# Altium PCB PCB2.PcbDoc
Units mil, origin at the board's own origin, x right, y up, seen from the top; angles counter-clockwise.
Board outline 6000 x 4000 mil, 2 copper layers (Top Layer, Bottom Layer); 67 components, 73 nets, 308 pads, 0 vias.
Unrouted connection lines stored in the file: 160.
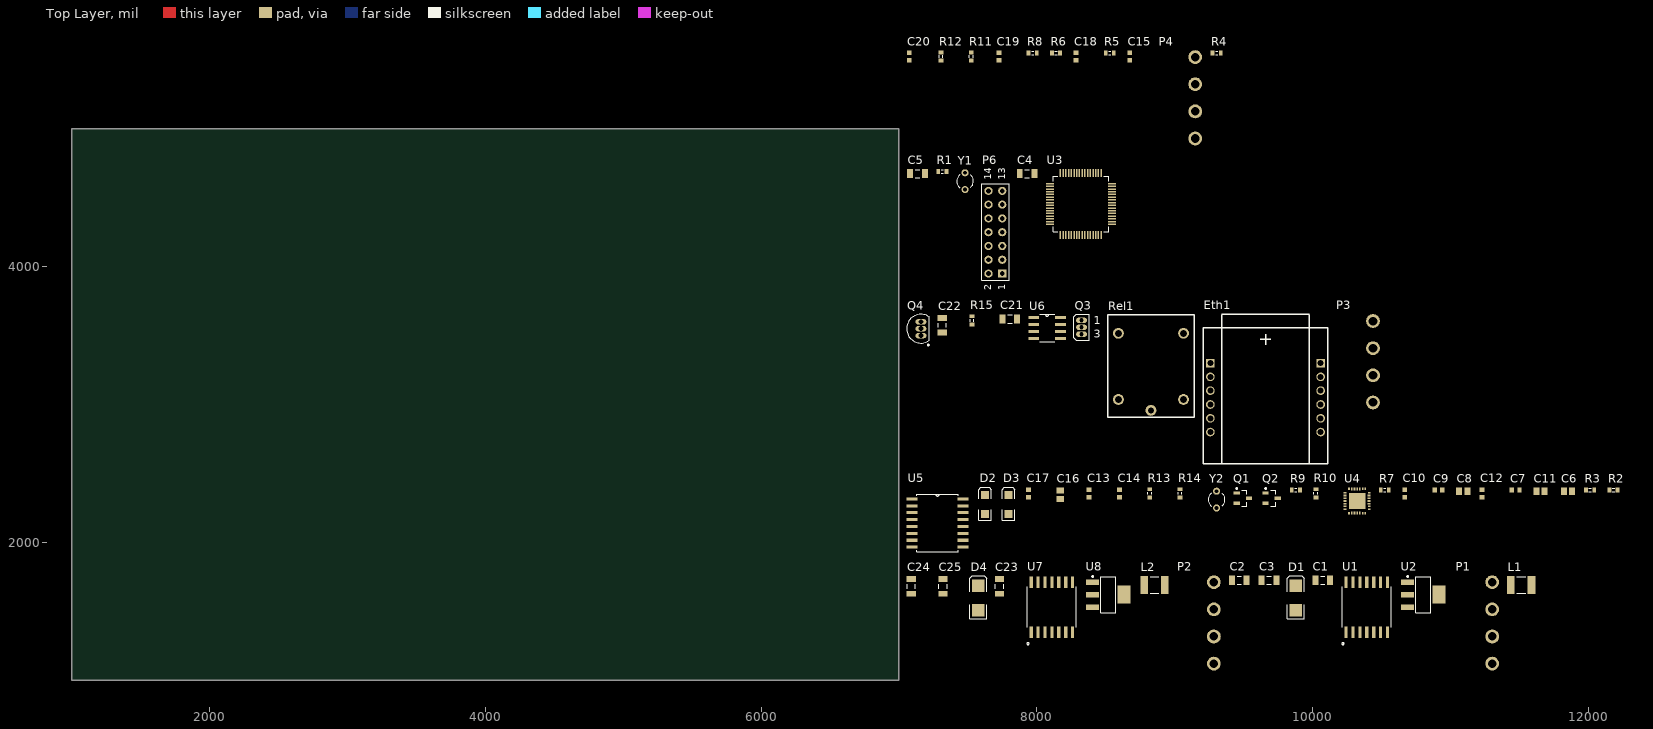
[diagram p0: Top Layer view]
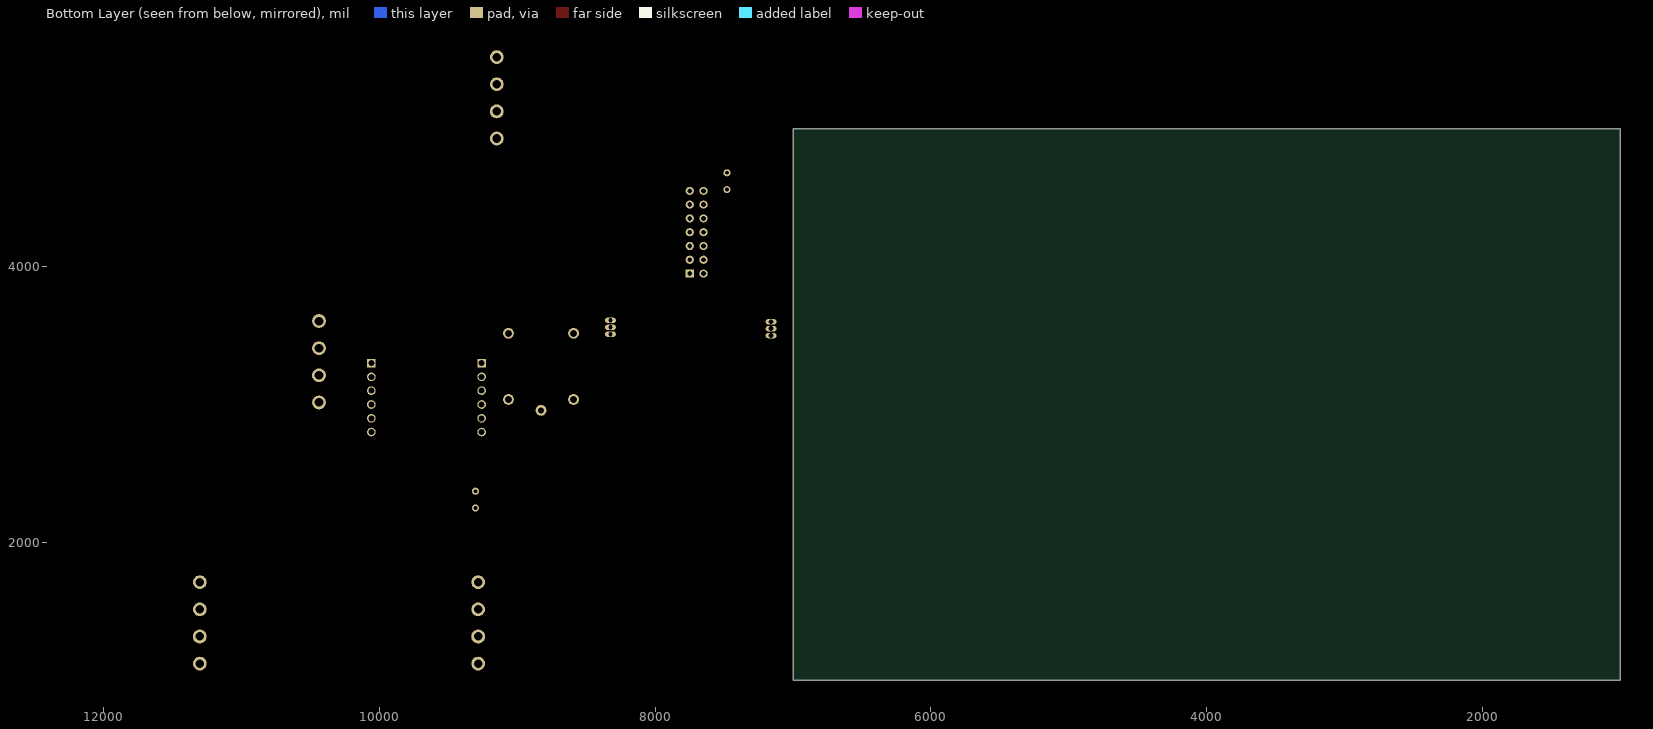
[diagram p1: Bottom Layer view, seen from below]

## Layer stack, top to bottom
Top Solder: solder mask 0.4, Solder Resist, Dk 3.5
Top Layer: signal copper 1.4
Dielectric 1: dielectric 12.6, FR-4, Dk 4.8
Bottom Layer: signal copper 1.4
Bottom Solder: solder mask 0.4, Solder Resist, Dk 3.5

## Board outline
1000,1000 7000,1000 7000,5000 1000,5000

## Design rules (kind name [scope] priority, off if disabled: settings)
Clearance [All] p1: gap=10
PolygonConnect [All] p1: connectstyle=Relief reliefconductorwidth=10 reliefentries=4 polygonreliefangle="90 Angle" airgapwidth=10
RoomDefinition ParteAnalogicaMedicion [InComponentClass('ParteAnalogicaMedicion')] p1: confinementstyle=ConfineIn formatcopy=TRUE lockcomponents=FALSE outline 7045,4870 9385,4870 9385,5680 7045,5680
RoomDefinition Micro [InComponentClass('Micro')] p2: confinementstyle=ConfineIn formatcopy=TRUE lockcomponents=FALSE outline 7045,3815 8585,3815 8585,4820 7045,4820
RoomDefinition comms [InComponentClass('comms')] p3: confinementstyle=ConfineIn formatcopy=TRUE lockcomponents=FALSE outline 7045,2560 10500,2560 10500,3765 7045,3765
RoomDefinition CircuitoMedidorADE [InComponentClass('CircuitoMedidorADE')] p4: confinementstyle=ConfineIn formatcopy=TRUE lockcomponents=FALSE outline 7045,1925 12265,1925 12265,2510 7045,2510
RoomDefinition Alimentacion [InComponentClass('Alimentacion')] p5: confinementstyle=ConfineIn formatcopy=TRUE lockcomponents=FALSE outline 7045,1060 11630,1060 11630,1870 7045,1870
RoutingVias [All] p1: holewidth=28 width=50 viastyle="Through Hole" minholewidth=28 minwidth=50 maxholewidth=28 maxwidth=50
SolderMaskExpansion [All] p1: expansion=4
Width [All] p1: maxlimit=10 minlimit=10 preferedwidth=10
30 further rules are at their usual default settings.

## Classes and differential pairs
component class ParteAnalogicaMedicion: C15 C18 C19 C20 P4 R4 R5 R6 R8 R11 R12
component class Micro: C4 C5 P6 R1 U3 Y1
component class comms: C21 C22 Eth1 P3 Q3 Q4 R15 Rel1 U6
component class CircuitoMedidorADE: C6 C7 C8 C9 C10 C11 C12 C13 C14 C16 C17 D2 D3 Q1 Q2 R2 R3 R7 R9 R10 R13 R14 U4 U5 Y2
component class Alimentacion: C1 C2 C3 C23 C24 C25 D1 D4 L1 L2 P1 P2 U1 U2 U7 U8

## Components (designator, comment, footprint, x,y, rotation, side; value= is the part's Value field where it differs from the comment)
C1 "Cap Semi" C1206 10075,1725 r0 top
C2 "Cap Semi" C1206 9470,1725 r0 top
C3 "Cap Semi" C1206 9685,1725 r0 top
C4 "Cap Semi" C1206 7930,4675 r0 top
C5 "Cap Semi" C1206 7135,4675 r0 top
C6 "Cap Pol3" C0805 11855,2370 r0 top
C7 "Cap" 1608[0603] 11475,2380 r0 top
C8 "Cap Pol3" C0805 11095,2370 r0 top
C9 "Cap" 1608[0603] 10915,2380 r0 top
C10 "Cap" 1608[0603] 10670,2355 r90 top
C11 "Cap Pol3" C0805 11655,2370 r0 top
C12 "Cap" 1608[0603] 11230,2355 r90 top
C13 "Cap" 1608[0603] 8380,2355 r90 top
C14 "Cap" 1608[0603] 8600,2355 r90 top
C15 "Cap" 1608[0603] 8675,5525 r90 top
C16 "Cap Pol3" C0805 8170,2345 r90 top
C17 "Cap" 1608[0603] 7940,2355 r90 top
C18 "Cap" 1608[0603] 8285,5525 r90 top
C19 "Cap" 1608[0603] 7725,5525 r90 top
C20 "Cap" 1608[0603] 7075,5525 r90 top
C21 "Cap Semi" C1206 7805,3620 r0 top
C22 "Cap Semi" C1206 7315,3575 r90 top
C23 "Cap Semi" C1206 7730,1680 r90 top
C24 "Cap Semi" C1206 7090,1680 r90 top
C25 "Cap Semi" C1206 7320,1680 r90 top
D1 "D Schottky" SMB 9880,1595 r90 top
D2 "LED2" 3.2X1.6X1.1 7625,2275 r90 top
D3 "LED2" 3.2X1.6X1.1 7795,2275 r90 top
D4 "D Schottky" SMB 7575,1595 r90 top
Eth1 "wiz8" wiz8 9260,2800 r0 top
L1 "Inductor" INDC4532 11515,1690 r0 top
L2 "Inductor" INDC4532 8855,1690 r0 top
P1 "Header 4" ConectorPrsr 11305,1120 r90 top
P2 "Header 4" ConectorPrsr 9285,1120 r90 top
P3 "Header 4" ConectorPrsr 10440,3015 r90 top
P4 "Header 4" ConectorPrsr 9150,4930 r90 top
P6 "Header 7X2" HDR2X7 7750,3950 r90 top
Q1 "PNP" SOT-23B_N 9495,2320 r0 top
Q2 "PNP" SOT-23B_N 9705,2320 r0 top
Q3 "MOSFET-N" E3 8325,3560 r0 top
Q4 "NPN 2N4922" TO-226-AA 7160,3550 r0 top
R1 "Res3" J1-0603 7315,4690 r0 top
R2 "Res3" J1-0603 12185,2380 r0 top
R3 "Res3" J1-0603 12015,2380 r0 top
R4 "Res3" J1-0603 9305,5550 r0 top
R5 "Res3" J1-0603 8530,5550 r0 top
R6 "Res3" J1-0603 8140,5550 r0 top
R7 "Res3" J1-0603 10525,2380 r0 top
R8 "Low tolerance resist" J1-0603 7970,5550 r0 top
R9 "Res3" J1-0603 9880,2380 r0 top
R10 "Res3" J1-0603 10025,2355 r90 top
R11 "Res Shunt" J1-0603 7525,5525 r90 top
R12 "Low tolerance resistor" J1-0603 7305,5525 r90 top
R13 "Res3" J1-0603 8820,2355 r90 top
R14 "Res3" J1-0603 9040,2355 r90 top
R15 "Res3" J1-0603 7530,3610 r90 top
Rel1 "SRD-03-VDC" ReleSRD 9065,3115 r90 top
U1 "LM2574N-5" SOIC127P1033X264-14N 10395,1530 r90 top
U2 "LM1117IMPX-3.3" MP04A_N 10805,1620 r0 top
U3 "MSP430F2410TPMR" QFP50P1200X1200X160-64N 8320,4455 r0 top
U4 "ADE7953" *LFCSP28_ADE7953(Primary) 10325,2300 r0 top
U5 "aDUM1412" *SOIC127P1032X265-16N 7280,2140 r0 top
U6 "XTR115UA/2K5E4" *SOIC127P600X175-8N 8075,3555 r0 top
U7 "LM2574N-5" SOIC127P1033X264-14N 8110,1530 r90 top
U8 "LM1117IMPX-3.3" MP04A_N 8520,1620 r0 top
Y1 "XTAL" R38 7480,4620 r0 top
Y2 "XTAL 3.58MHZ" R38 9305,2310 r0 top

## Footprints (in the part's own frame and the unit in brackets; to place one, negate y for a bottom-side part, rotate by r counter-clockwise, add the part's x,y. Pads: shape width x height; smd on the part's side, far side on the other; paste and mask are expansions set on the pad)
3.2X1.6X1.1 [mm] "SMT LED; 2 Flat Leads"
  rect 1.5x1.5 smd: 1(-1.75,0) 2(1.75,0)
  silkscreen extent -2.9,-1.15 3.2,1.15
1608[0603] [mm] "Chip Capacitor, Body 1.6x0.8mm, IPC High Density"
  rect 0.8x0.9 smd: 1(-0.7,0) 2(0.7,0)
  body extent -0.87,-0.48 0.87,0.48, height 1.3
*LFCSP28_ADE7953(Primary) [mm]
  rect 0.5x0.3 smd: 1(-2.25,1.5) 6(-2.25,-1) 7(-2.25,-1.5) 15(2.25,-1.5) 16(2.25,-1) 21(2.25,1.5)
  rect 0.55x0.3 smd: 2(-2.225,1) 3(-2.225,0.5) 4(-2.225,0) 5(-2.225,-0.5) 17(2.225,-0.5) 18(2.225,0) 19(2.225,0.5) 20(2.225,1)
  rect 0.3x0.5 smd: 8(-1.5,-2.25) 13(1,-2.25) 14(1.5,-2.25) 22(1.5,2.25) 23(1,2.25) 28(-1.5,2.25)
  rect 0.3x0.55 smd: 9(-1,-2.225) 10(-0.5,-2.225) 11(0,-2.225) 12(0.5,-2.225) 24(0.5,2.225) 25(0,2.225) 26(-0.5,2.225) 27(-1,2.225)
  rect 3x3 smd: EXP(0,0)
*SOIC127P600X175-8N [mil]
  rect 78x22 smd: 1(-97,75) 2(-97,25) 3(-97,-25) 4(-97,-75) 5(97,-75) 6(97,-25) 7(97,25) 8(97,75)
  silkscreen extent -54,-98 54,98
*SOIC127P1032X265-16N [mil]
  rect 78x22 smd: 1(-185,175) 2(-185,125) 3(-185,75) 4(-185,25) 5(-185,-25) 6(-185,-75) 7(-185,-125) 8(-185,-175) 9(185,-175) 10(185,-125) 11(185,-75) 12(185,-25) 13(185,25) 14(185,75) 15(185,125) 16(185,175)
  silkscreen extent -150,-207 150,207
C0805 [mm] "Chip Capacitor, Body 2.0x1.3mm, IPC High Density"
  rect 1.1x1.4 smd: 1(-0.75,0) 2(0.75,0)
  body extent -1.1,-0.72 1.1,0.72, height 1.4
C1206 [mm] "Chip Capacitor, Body 3.2x1.6mm, IPC High Density"
  rect 1.1x1.7 smd: 1(-1.35,0) 2(1.35,0)
  silkscreen extent -0.4,-0.75 0.4,0.75, body extent -1.7,-0.9 1.7,0.9, height 1.3
ConectorPrsr [mm]
  round 2.54 hole 1.575: 1(0,0) 3(10,0) 4(15,0)
  oval 2.54x2.57 hole 1.575: 2(5,0)
  body extent 0,2 15,7, height 20
E3 [mm] "TO, Flat Index; 3 In-Line, Axial Leads; Body Dia. 4.6mm; Lead Dia. 0.5 mm (max)"
  oval 2x1 hole 0.8: 1(0,1.27) 2(0,0) 3(0,-1.27)
  silkscreen extent -1.41,-2.41 1.41,2.41
HDR2X7 [mm] "Connector; Header; 7x2 Position"
  rect 1.5x1.5 hole 0.9: 1(0,0)
  round 1.5 hole 0.9: 2(0,2.54) 3(2.54,0) 4(2.54,2.54) 5(5.08,0) 6(5.08,2.54) 7(7.62,0) 8(7.62,2.54) 9(10.16,0) 10(10.16,2.54) 11(12.7,0) 12(12.7,2.54) 13(15.24,0) 14(15.24,2.54)
  silkscreen extent -1.27,-1.27 16.51,3.81
INDC4532 [mm] "Chip Inductor, Body 4.5x3.2mm, IPC High Density"
  rect 1.4x3.3 smd: 1(-1.9,0) 2(1.9,0)
  silkscreen extent -0.8,-1.55 0.8,1.55, body extent -2.4,-1.7 2.4,1.7, height 0.55
J1-0603 [mm] "Chip Resistor, Body 1.6x0.8mm, IPC High Density"
  rect 0.7x0.9 smd: 1(-0.75,0) 2(0.75,0)
  silkscreen extent -0.2,-0.35 0.2,0.35, body extent -0.85,-0.48 0.85,0.48, height 0.9
MP04A_N [mm] "SOT223, 4-Leads, Body 6.5x3.5mm, Pitch 2.3mm, Lead Span 7mm, IPC Medium Density"
  rect 2.4x1 smd: 1(-2.9,2.3) 2(-2.9,0) 3(-2.9,-2.3)
  rect 2.4x3.3 smd: 4(2.9,0)
  silkscreen extent -3.02,-3.35 1.4,3.47, body extent -1.85,-3.35 1.85,3.35, height 1.8
QFP50P1200X1200X160-64N [mil]
  rect 58x11 smd: 1(-225,148) 2(-225,128) 3(-225,108) 4(-225,89) 5(-225,69) 6(-225,49) 7(-225,30) 8(-225,10) 9(-225,-10) 10(-225,-30) 11(-225,-49) 12(-225,-69) 13(-225,-89) 14(-225,-108) 15(-225,-128) 16(-225,-148) 33(225,-148) 34(225,-128) 35(225,-108) 36(225,-89) 37(225,-69) 38(225,-49) 39(225,-30) 40(225,-10) 41(225,10) 42(225,30) 43(225,49) 44(225,69) 45(225,89) 46(225,108) 47(225,128) 48(225,148)
  rect 11x58 smd: 17(-148,-225) 18(-128,-225) 19(-108,-225) 20(-89,-225) 21(-69,-225) 22(-49,-225) 23(-30,-225) 24(-10,-225) 25(10,-225) 26(30,-225) 27(49,-225) 28(69,-225) 29(89,-225) 30(108,-225) 31(128,-225) 32(148,-225) 49(148,225) 50(128,225) 51(108,225) 52(89,225) 53(69,225) 54(49,225) 55(30,225) 56(10,225) 57(-10,225) 58(-30,225) 59(-49,225) 60(-69,225) 61(-89,225) 62(-108,225) 63(-128,225) 64(-148,225)
  silkscreen extent -201,-201 201,201
R38 [mm] "Crystal, Thru-Hole; 2 Leads; Body 3.1 x 8.2 mm (Dia.xH)"
  round 1.3 hole 0.7: 1(0,1.55) 2(0,-1.55)
  silkscreen extent -1.55,-1.19 1.55,1.17
ReleSRD [mm] "SRD-03-VDC"
  round 2 hole 1.3: 1(-2,12) 3(-2,0) 4(10.2,0) 5(10.2,12)
  round 2 hole 1.1: 2(-4,6)
  silkscreen extent -5.3,-2 13.6,14
SMB [mm] "DO-214-AA/SMB; 2 C-Bend Leads; Body 5.3 x 3.6 mm, inc. leads (LxW)"
  rect 2.3x2.3 smd: 1(-2.25,0) 2(2.25,0)
  silkscreen extent -3.8,-1.55 4.1,1.55
SOIC127P1033X264-14N [mm]
  rect 2.12x0.59 smd: 1(-4.615,3.81) 2(-4.615,2.54) 3(-4.615,1.27) 4(-4.615,0) 5(-4.615,-1.27) 6(-4.615,-2.54) 7(-4.615,-3.81) 8(4.615,-3.81) 9(4.615,-2.54) 10(4.615,-1.27) 11(4.615,0) 12(4.615,1.27) 13(4.615,2.54) 14(4.615,3.81)
  silkscreen extent -6.93,-4.5 3.75,4.6
SOT-23B_N [mm] "SOT23, 3-Leads, Body 2.9x1.3mm, Pitch 0.95mm, Lead Span 2.4mm, IPC Medium Density"
  rect 1.15x0.6 smd: 1(-1.125,0.95) 2(-1.125,-0.95) 3(1.125,0)
  silkscreen extent -1.25,-1.5 0.7,1.92, body extent -0.7,-1.5 0.7,1.5, height 1.14
TO-226-AA [mm] "TO, Flat Index; 3 In-Line, Axial Leads; Body Dia. 4.8mm; Leads 0.55 x 0.51 mm (max)"
  oval 2x1 hole 0.9: 1(0,-1.27) 2(0,0) 3(0,1.27)
  silkscreen extent -2.65,-3.13 1.52,2.65, body extent -2.65,-2.66 1.52,2.66, height 5.33
wiz8 [mm]
  rect 1.59x1.59 hole 1.1: 1(0,12.7) 7(20.32,12.7)
  round 1.59 hole 1.1: 2(0,10.16) 3(0,7.62) 4(0,5.08) 5(0,2.54) 6(0,0) 8(20.32,10.16) 9(20.32,7.62) 10(20.32,5.08) 11(20.32,2.54) 12(20.32,0)
  silkscreen extent -1.34,-5.8 21.66,21.7

## Part data
C1 C2 C3 C4 C5 C21 C22 C23 C24 C25: "Capacitor (Semiconductor SIM Model)"
C6 C8 C11 C16: "Polarized Capacitor (Surface Mount)"
C7 C9 C10 C12 C13 C14 C15 C17 C18 C19 C20: "Capacitor"
D1 D4: "Schottky Diode"
D2 D3: "Typical RED, GREEN, YELLOW, AMBER GaAs LED"
P1 P2 P3 P4: "Header, 4-Pin"
P6: "Header, 7-Pin, Dual row"
Q1 Q2: "PNP Bipolar Transistor"
Q3: "N-Channel MOSFET"
Q4: library part NPN, "NPN Bipolar Transistor"
R1 R2 R3 R4 R5 R6 R7 R9 R10 R13 R14 R15: "Resistor"
R8 R11 R12: library part Res3, "Resistor"
Rel1: library part Rele_1
U1 U7: "Easy Switcher 0.5A Step-Down Voltage Regulator"
U2 U8: "800mA Low-Dropout Linear Regulator, 4-pin SOT-223"
U3: "16-bit Ultra-Low-Power Microcontroller, 56KB Flash, 4KB RAM, 12-Bit ADC, 2 USCIs, HW Multiplier 64-LQFP -40 to 105"
U5: library part ADUM1411ARWZ-RL, "Digital Isolator CMOS 4-CH 1Mbps 16-Pin SOIC W T/R"
U6: "Current Loop Transmitter 8-Pin SOIC T/R"
Y1: "Crystal Oscillator"
Y2: library part XTAL, "Crystal Oscillator"

## Nets (pads, with @x,y where several pads share a name; then routed paths per layer and width w, separated by ;. In a path a pad name is that pad's centre, name@x,y a point inside that pad or via, vN(x,y) a via of type N, cw(c..) or ccw(c..) an arc to the next point about the centre after c; other vN are vias at no path point)
3V3: U5.1
ANALOG: C6.2 C7.1 C11.2 C12.1 C15.1 C18.2 C19.1 C20.2 P4.3 R5.1 R6.2 U4.16
BSL_RX: P6.14 U3.22
BSL_TX: P6.12 U3.13
CRYST0: U3.8 Y1.1
CS: C10.2 C11.1 C12.2 C25.2 Q1.1 Q2.1 R2.2 R7.2 R9.2 R10.2 U4.17 U4.28 U5.16 U8.2
CURRENT_MEASUREMENTA: P4.2 R8.2 R11.1
CURRENT_MEASUREMENTB: P4.1 R11.2 R12.2
DCIN1: C8.2 C9.1 C13.1 C14.1 C16.2 C17.1 C23.1 C24.1 C25.1 D2.2 D3.2 D4.1 P1.1 U4.25 U5.2 U5.8 U5.10 U7.4 U7.5 U7.6 U8.1
DCIN2: C23.2 P1.2 U7.10
DCIN3: C1.1 C2.1 C3.1 C4.1 C5.1 C22.1 D1.1 Eth1.1 Eth1.2 Eth1.7 P1.3 Rel1.3 U1.4 U1.5 U1.6 U2.1 U3.63 U5.7 U5.9 U5.15 U6.3
DCIN4: C1.2 P1.4 U1.10
IRQAD: R2.1 U5.12
MICRO_RTS_1: P6.11 R1.2 U3.58
MICRO_TCK_1: P6.7 U3.57
MICRO_TD0_1: P6.1 U3.54
MICRO_TDI_1: P6.3 U3.55
MICRO_TMS_1: P6.5 U3.56
MISO_RX: U4.27 U5.13
MOSI_TX: U4.26 U5.11
NEGATIVE_REF: U3.11 U3.62
NetC2_2: C2.2 L1.1 U1.3 U2.3
NetC4_2: C4.2 U3.7
NetC6_1: C6.1 C7.2 U4.15
NetC8_1: C8.1 C9.2 R3.2
NetC10_1: C10.1 U4.2
NetC13_2: C13.2 U4.18 Y2.1
NetC14_2: C14.2 Y2.2
NetC15_2: C15.2 R4.2 R5.2 U4.12
NetC16_1: C16.1 C17.2
NetC18_1: C18.1 R6.1 U4.11
NetC19_2: C19.2 R8.1 U4.5
NetC20_1: C20.1 R12.1 U4.6
NetC22_2: C22.2 R15.2
NetC24_2: C24.2 L2.1 U7.3 U8.3
NetD2_1: D2.1 R13.1
NetD3_1: D3.1 R14.1
NetEth1_3: Eth1.3 U3.45
NetEth1_4: Eth1.4 U3.47
NetEth1_5: Eth1.5 U3.44
NetEth1_6: Eth1.6 U3.48
NetEth1_10: Eth1.10 U3.49
NetEth1_11: Eth1.11 U3.50
NetEth1_12: Eth1.12 U3.46
NetP2_1: P2.1 P2.2 P2.3 P2.4
NetP3_1: P3.1 Rel1.2
NetP3_2: P3.2 Rel1.4
NetP4_4: P4.4 R4.1
NetQ1_2: Q1.2 R9.1 U4.24
NetQ1_3: Q1.3 R13.2
NetQ2_2: Q2.2 R10.1
NetQ2_3: Q2.3 R14.2
NetQ3_2: Q3.2
NetQ3_3: Q3.3 Rel1.1
NetQ4_2: Q4.2 U6.6
NetQ4_3: Q4.3 U6.5
NetR3_1: R3.1 U4.3
NetR15_1: R15.1 U6.2
NetU3_9: U3.9 Y1.2
NetU3_30: U3.30 U5.3
NetU3_31: U3.31 U5.5
NetU3_32: U3.32 U5.6
NetU3_33: U3.33 U5.4
NetU4_9: U4.9
NetU4_10: U4.10
NetU4_20: U4.20
NetU4_21: U4.21
OUTLM: D1.2 D4.2 L1.2 L2.2 U1.12 U7.12
REF: U3.10
RESETT: R7.1 U5.14
SAL3: C21.1 P3.3 U6.4
SAL4: C21.2 P3.4 Q4.1 U6.7
V3V3: C3.2 C5.2 Eth1.8 Eth1.9 Q3.1 R1.1 U2.2 U3.1 U3.64
pads on no net: P6.2 P6.4 P6.6 P6.8 P6.9 P6.10 P6.13 Rel1.5 U1.1 U1.2 U1.7 U1.8 U1.9 U1.11 U1.13 U1.14 U2.4 U3.2 U3.3 U3.4 U3.5 U3.6 U3.12 U3.14 U3.15 U3.16 U3.17 U3.18 U3.19 U3.20 U3.21 U3.23 U3.24 U3.25 U3.26 U3.27 U3.28 U3.29 U3.34 U3.35 U3.36 U3.37 U3.38 U3.39 U3.40 U3.41 U3.42 U3.43 U3.51 U3.52 U3.53 U3.59 U3.60 U3.61 U4.1 U4.4 U4.7 U4.8 U4.13 U4.14 U4.19 U4.22 U4.23 U4.EXP U6.1 U6.8 U7.1 U7.2 U7.7 U7.8 U7.9 U7.11 U7.13 U7.14 U8.4

## Text inside footprints (layer, text, board x,y; h text height)
P6: Top Overlay "2" at 7670,3830 h50 r90; Top Overlay "1" at 7770,3830 h50 r90; Top Overlay "14" at 7670,4630 h50 r90; Top Overlay "13" at 7770,4630 h50 r90
Q3: Top Overlay "1" at 8414.57,3581.85 h59.05; Top Overlay "3" at 8414.57,3482.72 h59.05
U5: Mechanical 13 "*" at 7062.44,2322.65 h73.82; Mechanical 13 "*" at 7062.44,2322.65 h73.82